# EAGLE board midi2cv v1.2 (EAGLE 9.5.2)
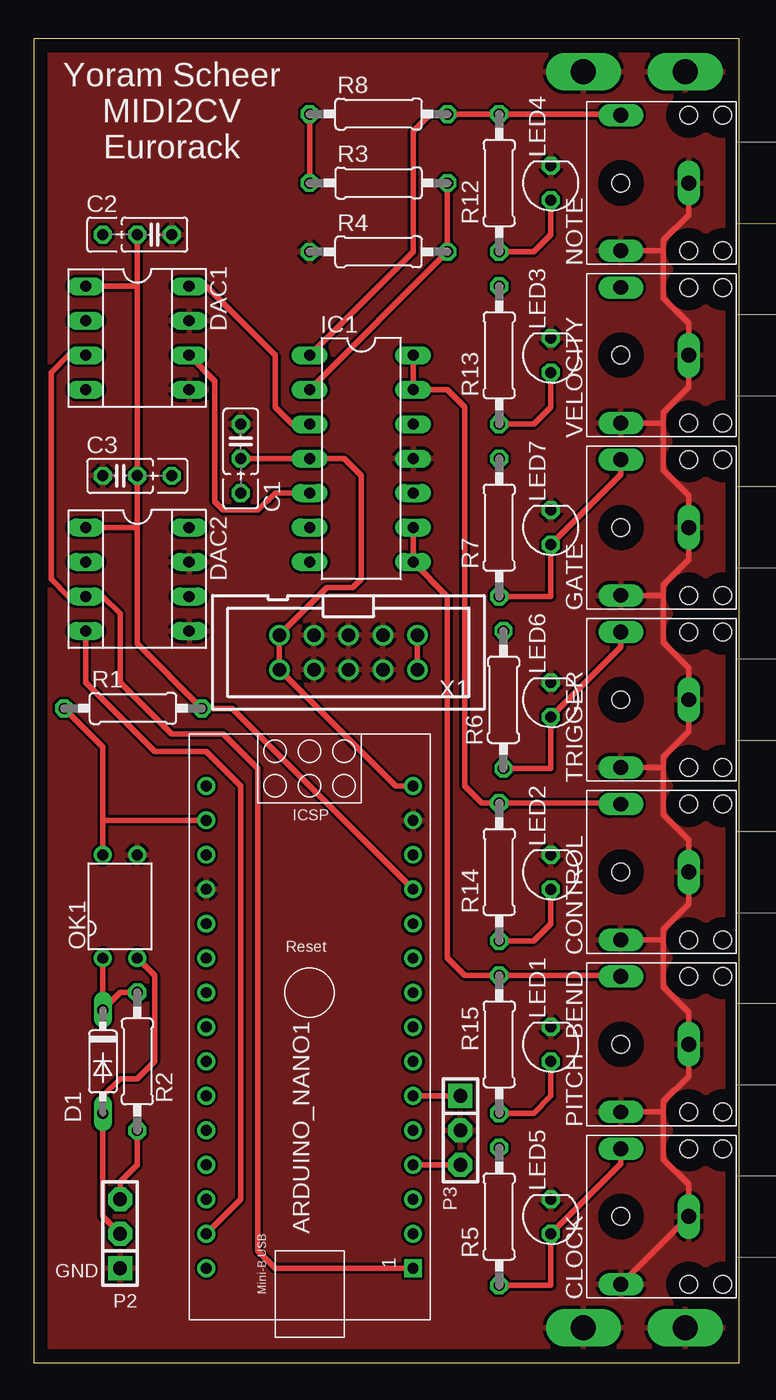
[diagram p0: board, top side]
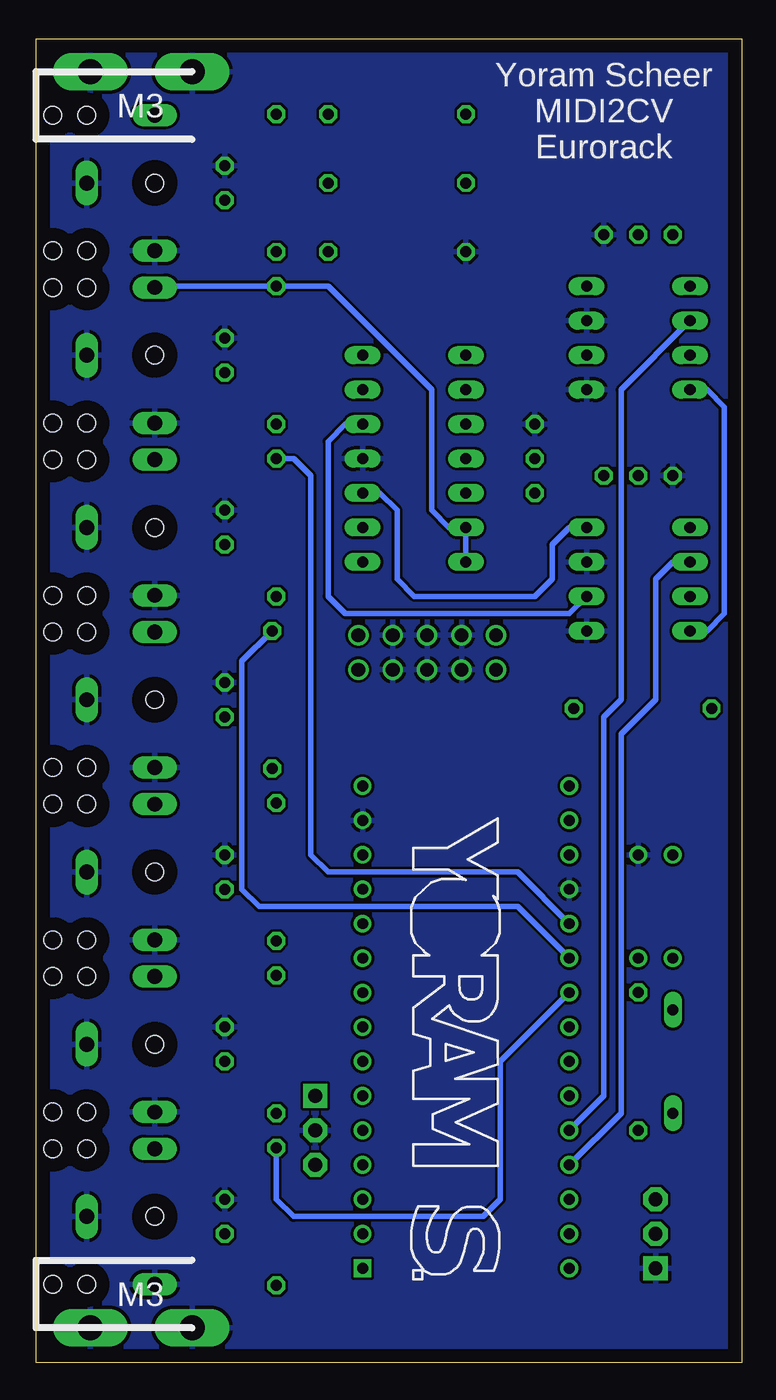
[diagram p1: board, bottom side, seen from below]

Size 52 x 97.64 mm. Coordinates in mm from the lower left corner, seen from the top.
Outline: 0,0 52,0 52,97.64 0,97.64 0,0
Copper layers (1*16): Top 0.035mm / dielectric 1.5mm / Bottom 0.035mm
Design rules "default *": minimum track width 6mil, minimum drill 0.35mm, track to track 8mil, track to pad 8mil, pad to pad 8mil, via to via 8mil, smd to smd 8mil, copper to edge 40mil, drill to drill 6mil, minimum pad ring 10mil, minimum via ring 8mil, stop-mask expansion 4mil, vias tented up to drill 0mil, thermal gap 10mil

## Footprints (pad centres in the part's own frame; a part is rotated, then mirrored left to right if it is on the bottom)
ARDUINO_NANO = drill 0.8 square: 1 -20.32,-7.62 | drill 0.8: 2 -17.78,-7.62; 3 -15.24,-7.62; 4 -12.7,-7.62; 5 -10.16,-7.62; 6 -7.62,-7.62; 7 -5.08,-7.62; 8 -2.54,-7.62; 9 0,-7.62; 10 2.54,-7.62; 11 5.08,-7.62; 12 7.62,-7.62; 13 10.16,-7.62; 14 12.7,-7.62; 15 15.24,-7.62; 16 15.24,7.62; 17 12.7,7.62; 18 10.16,7.62; 19 7.62,7.62; 20 5.08,7.62; 21 2.54,7.62; 22 0,7.62; 23 -2.54,7.62; 24 -5.08,7.62; 25 -7.62,7.62; 26 -10.16,7.62; 27 -12.7,7.62; 28 -15.24,7.62; 29 -17.78,7.62; 30 -20.32,7.62
C025_050-025X075 = drill 0.813 octagon: 1 -1.27,0; 2 1.27,0; 3 3.81,0
3.5_JACK_HORIZONTAL = drill 1.1 long: P$1 0,0; P$2 5,-5; P$5 5,5 | hole 1.3: 0,-5; -2.5,-5; -2.5,5; 0,5; 5,0
DO35-7 = drill 0.813 long: A 3.81,0; C -3.81,0
SOCKET-08 = drill 0.813 long: 1 -3.81,-3.81; 2 -1.27,-3.81; 3 1.27,-3.81; 4 3.81,-3.81; 5 3.81,3.81; 6 1.27,3.81; 7 -1.27,3.81; 8 -3.81,3.81
DIL14 = drill 0.813 long: 1 -7.62,-3.81; 2 -5.08,-3.81; 3 -2.54,-3.81; 4 0,-3.81; 5 2.54,-3.81; 6 5.08,-3.81; 7 7.62,-3.81; 8 7.62,3.81; 9 5.08,3.81; 10 2.54,3.81; 11 0,3.81; 12 -2.54,3.81; 13 -5.08,3.81; 14 -7.62,3.81
LED3MM = drill 0.813 octagon: A -1.27,0; K 1.27,0
DIP4 = drill 0.8: 1 -1.27,-3.81; 2 1.27,-3.81; 3 1.27,3.81; 4 -1.27,3.81
SIP-100-03-40 = drill 1.016 pad 1.778 square: 1 -2.54,0 | drill 1.016 pad 1.778 octagon: 2 0,0; 3 2.54,0
0207/10 = drill 0.813 octagon: 1 -5.08,0; 2 5.08,0
SCREW_TERM_SINGLE_LEFT = drill 1.85 long: P$1 0,2.5; P$2 7.5,2.5
SCREW_TERM_SINGLE_RIGHT = drill 1.85 long: P$1 0,-2.5; P$2 7.5,-2.5
PAK100/2500-10 = drill 1 pad 1.422: 1 -5.08,-1.27; 2 -5.08,1.27; 3 -2.54,-1.27; 4 -2.54,1.27; 5 0,-1.27; 6 0,1.27; 7 2.54,-1.27; 8 2.54,1.27; 9 5.08,-1.27; 10 5.08,1.27

## Placement (x,y rotation side)
ARDUINO_NANO1  [ARDUINO_NANO]  20.32,27.3 90 top
C1  0.1uF  [C025_050-025X075]  15.24,67.94 270 top
C2  0.1uF  [C025_050-025X075]  8.89,83.19 180 top
C3  0.1uF  [C025_050-025X075]  6.35,65.41 0 top
CLOCK  [3.5_JACK_HORIZONTAL]  48.26,10.79 180 top
CONTROL  [3.5_JACK_HORIZONTAL]  48.26,36.2 180 top
D1  1N4148  [DO35-7]  5.08,22.23 270 top
DAC1  MCP4822  [SOCKET-08]  7.62,75.56 270 top
DAC2  MCP4822  [SOCKET-08]  7.62,57.78 270 top
DRILEGEND  [DRILEGEND]  -0.2,-4.01 0 top  (outside the outline)
GATE  [3.5_JACK_HORIZONTAL]  48.26,61.59 180 top
IC1  LM324N  [DIL14]  24.13,66.67 270 top
LED1  [LED3MM]  38.1,23.5 90 top
LED2  [LED3MM]  38.1,36.2 90 top
LED3  [LED3MM]  38.1,74.3 90 top
LED4  [LED3MM]  38.1,87 90 top
LED5  [LED3MM]  38.1,10.79 90 top
LED6  [LED3MM]  38.1,48.9 90 top
LED7  [LED3MM]  38.1,61.59 90 top
NOTE  [3.5_JACK_HORIZONTAL]  48.26,87 180 top
OK1  SFH618A-2  [DIP4]  6.35,33.66 0 top
P2  MIDI-IN  [SIP-100-03-40]  6.35,9.53 90 top
P3  NP SEL  [SIP-100-03-40]  31.43,17.14 270 top
PITCH_BEND  [3.5_JACK_HORIZONTAL]  48.26,23.5 180 top
R1  500  [0207/10]  7.3,48.26 0 top
R2  220  [0207/10]  7.62,22.23 90 top
R3  3K  [0207/10]  25.4,87 180 top
R4  10K  [0207/10]  25.4,81.92 0 top
R5  1K  [0207/10]  34.29,10.79 270 top
R6  1K  [0207/10]  34.61,48.9 270 top
R7  1K  [0207/10]  34.29,61.59 270 top
R8  4.7K  [0207/10]  25.4,92.08 0 top
R12  1K  [0207/10]  34.29,87 270 top
R13  1K  [0207/10]  34.29,74.3 270 top
R14  1K  [0207/10]  34.29,36.2 270 top
R15  1K  [0207/10]  34.29,23.5 270 top
TRIGGER  [3.5_JACK_HORIZONTAL]  48.26,48.9 180 top
U$1  SCREW_TERMINAL_SINGLELEFT  [SCREW_TERM_SINGLE_LEFT]  40.5,5.08 180 bottom
U$2  SCREW_TERMINAL_SINGLERIGHT  [SCREW_TERM_SINGLE_RIGHT]  40.5,92.71 180 bottom
VELOCITY  [3.5_JACK_HORIZONTAL]  48.26,74.3 180 top
X1  POWER  [PAK100/2500-10]  23.18,52.39 180 top

## Library data of the parts
ARDUINO_NANO1 = ArduinoNanoV30
C1-C3 = rcl; SPICEPREFIX: C
CLOCK CONTROL GATE NOTE PITCH_BEND TRIGGER VELOCITY = Yoram2; ORDERCODE_FARNELL: 2518188
D1 = diode
DAC1 DAC2 = ic-package
DRILEGEND = drilegend
IC1 = linear
LED1-LED7 U$1 U$2 = Yoram2
OK1 = optocoupler; MF: VISHAY/TELEFUNKEN; MPN: SFH618A-2; OC_FARNELL: 6424855; OC_NEWARK: 21H7744
P2 P3 = con-headers-jp
R1-R8 R12-R15 = rcl; SPICEPREFIX: R
X1 = con-3m; MF: 3M; MPN: 2510-6002UB; OC_FARNELL: 9838244; OC_NEWARK: 46F4725

## Nets
5V: ARDUINO_NANO1.12 C2.2 C3.2 DAC1.1 DAC2.1 R1.2
A0: ARDUINO_NANO1.4 P3.3
A2: ARDUINO_NANO1.6 P3.1
CLOCK: CLOCK.P$2 LED5.A R5.2
CONTROL: CONTROL.P$2 IC1.13 IC1.14 R14.1
D2: ARDUINO_NANO1.20 R7.1
D3: ARDUINO_NANO1.21 R6.1
D4: ARDUINO_NANO1.22 R5.1
D8: ARDUINO_NANO1.26 DAC1.2
D9: ARDUINO_NANO1.27 DAC2.2
D11: ARDUINO_NANO1.29 DAC1.4 DAC2.4
D13: ARDUINO_NANO1.1 DAC1.3 DAC2.3
GATE: GATE.P$2 LED7.A R7.2
GND: ARDUINO_NANO1.14 ARDUINO_NANO1.19 C1.1 C2.1 C3.1 CLOCK.P$1 CLOCK.P$5 CONTROL.P$1 CONTROL.P$5 DAC1.5 DAC1.7 DAC2.5 DAC2.7 GATE.P$1 GATE.P$5 IC1.11 LED1.K LED2.K LED3.K LED4.K LED5.K LED6.K LED7.K NOTE.P$1 NOTE.P$5 OK1.3 P2.1 P3.2 PITCH_BEND.P$1 PITCH_BEND.P$5 R4.1 TRIGGER.P$1 TRIGGER.P$5 U$1.P$1 U$1.P$2 U$2.P$1 U$2.P$2 VELOCITY.P$1 VELOCITY.P$5 X1.3 X1.4 X1.5 X1.6 X1.7 X1.8
N$1: D1.C OK1.1 R2.2
N$2: D1.A OK1.2 P2.2
N$3: P2.3 R2.1
N$4: DAC1.8 IC1.3
N$5: R3.2 R8.1
N$6: IC1.2 R3.1 R4.2
N$7: DAC1.6 IC1.5
N$8: DAC2.8 IC1.10
N$9: DAC2.6 IC1.12
N$10: X1.1 X1.2
N$16: LED4.A R12.2
N$17: LED3.A R13.2
N$18: LED2.A R14.2
N$19: LED1.A R15.2
NOTE: IC1.1 NOTE.P$2 R8.2 R12.1
PITCH_BEND: IC1.8 IC1.9 PITCH_BEND.P$2 R15.1
RX0: ARDUINO_NANO1.17 OK1.4 R1.1
TRIGGER: LED6.A R6.2 TRIGGER.P$2
VELOCITY: IC1.6 IC1.7 R13.1 VELOCITY.P$2
VIN: ARDUINO_NANO1.15 C1.2 IC1.4 X1.9 X1.10

## Tracks (layer width: path | path; a pad name or v marks a point on that pad's centre or on a via)
5V
  Top 0.406: DAC1.1 7.62,79.38 C2.2 C3.2 7.62,61.59 | ARDUINO_NANO1.12 14.61,48.26 R1.2 7.62,53.02 7.62,61.59 | DAC2.1 7.62,61.59
A0
  Top 0.406: ARDUINO_NANO1.4 P3.3
A2
  Top 0.406: ARDUINO_NANO1.6 P3.1
CLOCK
  Top 0.406: R5.2 38.1,5.71 LED5.A 43.26,14.69 CLOCK.P$2
CONTROL
  Top 0.406: CONTROL.P$2 43.18,41.27 R14.1 33.02,41.27 31.75,42.55 31.75,70.48 30.48,71.75 IC1.13 IC1.14
D2
  Bottom 0.406: R7.1 33.02,66.67 31.75,65.41 31.75,37.47 30.48,36.2 16.51,36.2 ARDUINO_NANO1.20
D3
  Bottom 0.406: R6.1 36.83,51.75 36.83,34.92 35.56,33.66 16.51,33.66 ARDUINO_NANO1.21
D4
  Bottom 0.406: ARDUINO_NANO1.22 17.78,22.23 17.78,12.06 19.05,10.79 33.02,10.79 34.29,12.06 R5.1
D8
  Bottom 0.406: DAC1.2 8.89,71.75 8.89,48.9 10.16,47.62 10.16,19.68 ARDUINO_NANO1.26
D9
  Bottom 0.406: DAC2.2 5.08,59.05 6.35,57.78 6.35,48.9 8.89,46.35 8.89,18.41 ARDUINO_NANO1.27
D11
  Top 0.406: ARDUINO_NANO1.29 15.24,12.06 15.24,42.55 12.7,45.09 8.89,45.09 3.81,50.16 DAC2.4
  Bottom 0.406: DAC1.4 2.54,71.75 1.27,70.48 1.27,55.24 2.54,53.98 DAC2.4
D13
  Top 0.406: DAC1.3 2.54,74.3 1.27,73.03 1.27,57.78 2.54,56.52 DAC2.3 5.08,56.52 6.35,55.24 6.35,50.16 10.16,46.35 13.97,46.35 16.51,43.81 16.51,8.26 17.78,6.99 ARDUINO_NANO1.1
GATE
  Top 0.406: R7.2 38.1,56.52 LED7.A 43.26,65.48 GATE.P$2
GND
  Top 0.406: NOTE.P$1 48.26,84.64 46.39,82.77 46.39,81.92 | 46.39,81.92 46.39,78.52 48.26,76.65 VELOCITY.P$1 48.26,71.94 46.39,70.07 46.39,69.22 | 46.39,69.22 46.39,65.82 48.26,63.95 GATE.P$1 48.26,59.24 46.39,57.37 46.39,56.52 | 46.39,56.52 46.39,53.12 48.26,51.25 TRIGGER.P$1 48.26,46.54 46.39,44.67 46.39,43.81 | 46.39,43.81 46.39,40.42 48.26,38.55 CONTROL.P$1 48.26,33.84 46.39,31.97 46.39,31.11 | 46.39,31.11 46.39,27.72 48.26,25.85 PITCH_BEND.P$1 48.26,21.14 46.39,19.27 46.39,18.41 | 46.39,18.41 46.39,15.02 48.26,13.15 CLOCK.P$1 CLOCK.P$5 | PITCH_BEND.P$5 46.31,18.5 46.39,18.41 | CONTROL.P$5 46.31,31.2 46.39,31.11 | TRIGGER.P$5 46.31,43.9 46.39,43.81 | GATE.P$5 46.31,56.59 46.39,56.52 | VELOCITY.P$5 46.31,69.3 46.39,69.22 | NOTE.P$5 46.31,82 46.39,81.92
  pour Bottom: 0,0 52.07,0 52.07,97.79 0,97.79
  pour Top: 0,0 52.07,0 52.07,97.79 0,97.79
N$1
  Top 0.406: OK1.1 D1.C 6.35,27.3 R2.2
N$2
  Top 0.406: OK1.2 8.89,28.57 8.89,22.23 7.62,20.95 6.35,20.95 5.08,19.68 D1.A 5.08,12.63 5.05,12.6 5.05,10.82 P2.2
N$3
  Top 0.406: P2.3 6.35,13.34 7.62,14.61 R2.1
N$4
  Top 0.406: DAC1.8 12.7,79.38 17.78,74.3 17.78,70.48 19.05,69.22 IC1.3
N$5
  Top 0.406: R8.1 R3.2
N$6
  Top 0.406: R3.1 R4.2 IC1.2
N$7
  Top 0.406: DAC1.6 13.34,72.39 13.34,63.5 13.97,62.87 16.51,62.87 17.78,64.14 IC1.5
N$8
  Bottom 0.406: DAC2.8 12.7,61.59 13.97,60.33 13.97,57.78 15.24,56.52 24.13,56.52 25.4,57.78 25.4,62.87 26.67,64.14 IC1.10
N$9
  Bottom 0.406: DAC2.6 12.7,55.24 29.21,55.24 30.48,56.52 30.48,67.94 29.21,69.22 IC1.12
N$10
  Top 0.406: X1.1 X1.2
N$16
  Top 0.406: R12.2 36.83,81.92 38.1,83.19 LED4.A
N$17
  Top 0.406: R13.2 36.83,69.22 38.1,70.48 LED3.A
N$18
  Top 0.406: R14.2 36.83,31.11 38.1,32.38 LED2.A
N$19
  Top 0.406: R15.2 36.83,18.41 38.1,19.68 LED1.A
NOTE
  Top 0.406: IC1.1 27.94,81.92 27.94,90.81 29.21,92.08 R8.2 R12.1 43.18,92.08 NOTE.P$2
PITCH_BEND
  Top 0.406: IC1.9 IC1.8 30.48,56.52 30.48,29.84 31.75,28.57 R15.1 43.18,28.57 PITCH_BEND.P$2
RX0
  Top 0.406: R1.1 5.08,45.4 5.08,40.01 | 5.08,40.01 OK1.4 | ARDUINO_NANO1.17 5.08,40.01
TRIGGER
  Top 0.406: R6.2 38.1,43.81 LED6.A 43.26,52.78 TRIGGER.P$2
VELOCITY
  Bottom 0.406: IC1.7 IC1.6 21.59,61.59 22.86,62.87 22.86,71.75 30.48,79.38 R13.1 43.18,79.38 VELOCITY.P$2
VIN
  Top 0.406: C1.2 IC1.4 22.86,66.67 24.13,65.41 24.13,57.78 23.5,57.15 21.59,57.15 X1.9 X1.10 26.67,42.55 ARDUINO_NANO1.15

## Text on the board
tPlace: Yoram Scheer / MIDI2CV / Eurorack | GND
bPlace: Yoram Scheer / MIDI2CV / Eurorack
DrillLegend: LAYER-STACK
DrillLegend_01-16: 01-16
DrillLegend_01-20: 01-20